# Altium PCB MGMEZZ04TEST.PCBDOC (part 2 of 2)
Units mil, origin at the board's own origin, x right, y up, seen from the top; angles counter-clockwise.
Board outline 4922.86 x 3627.76 mil, 6 copper layers (Top Layer, Internal Plane 1, Mid-Layer 1, Internal Plane 2, Mid-Layer 2, Bottom Layer); 10 components, 606 nets, 200 pads, 150 vias.
Unrouted connection lines stored in the file: 9.
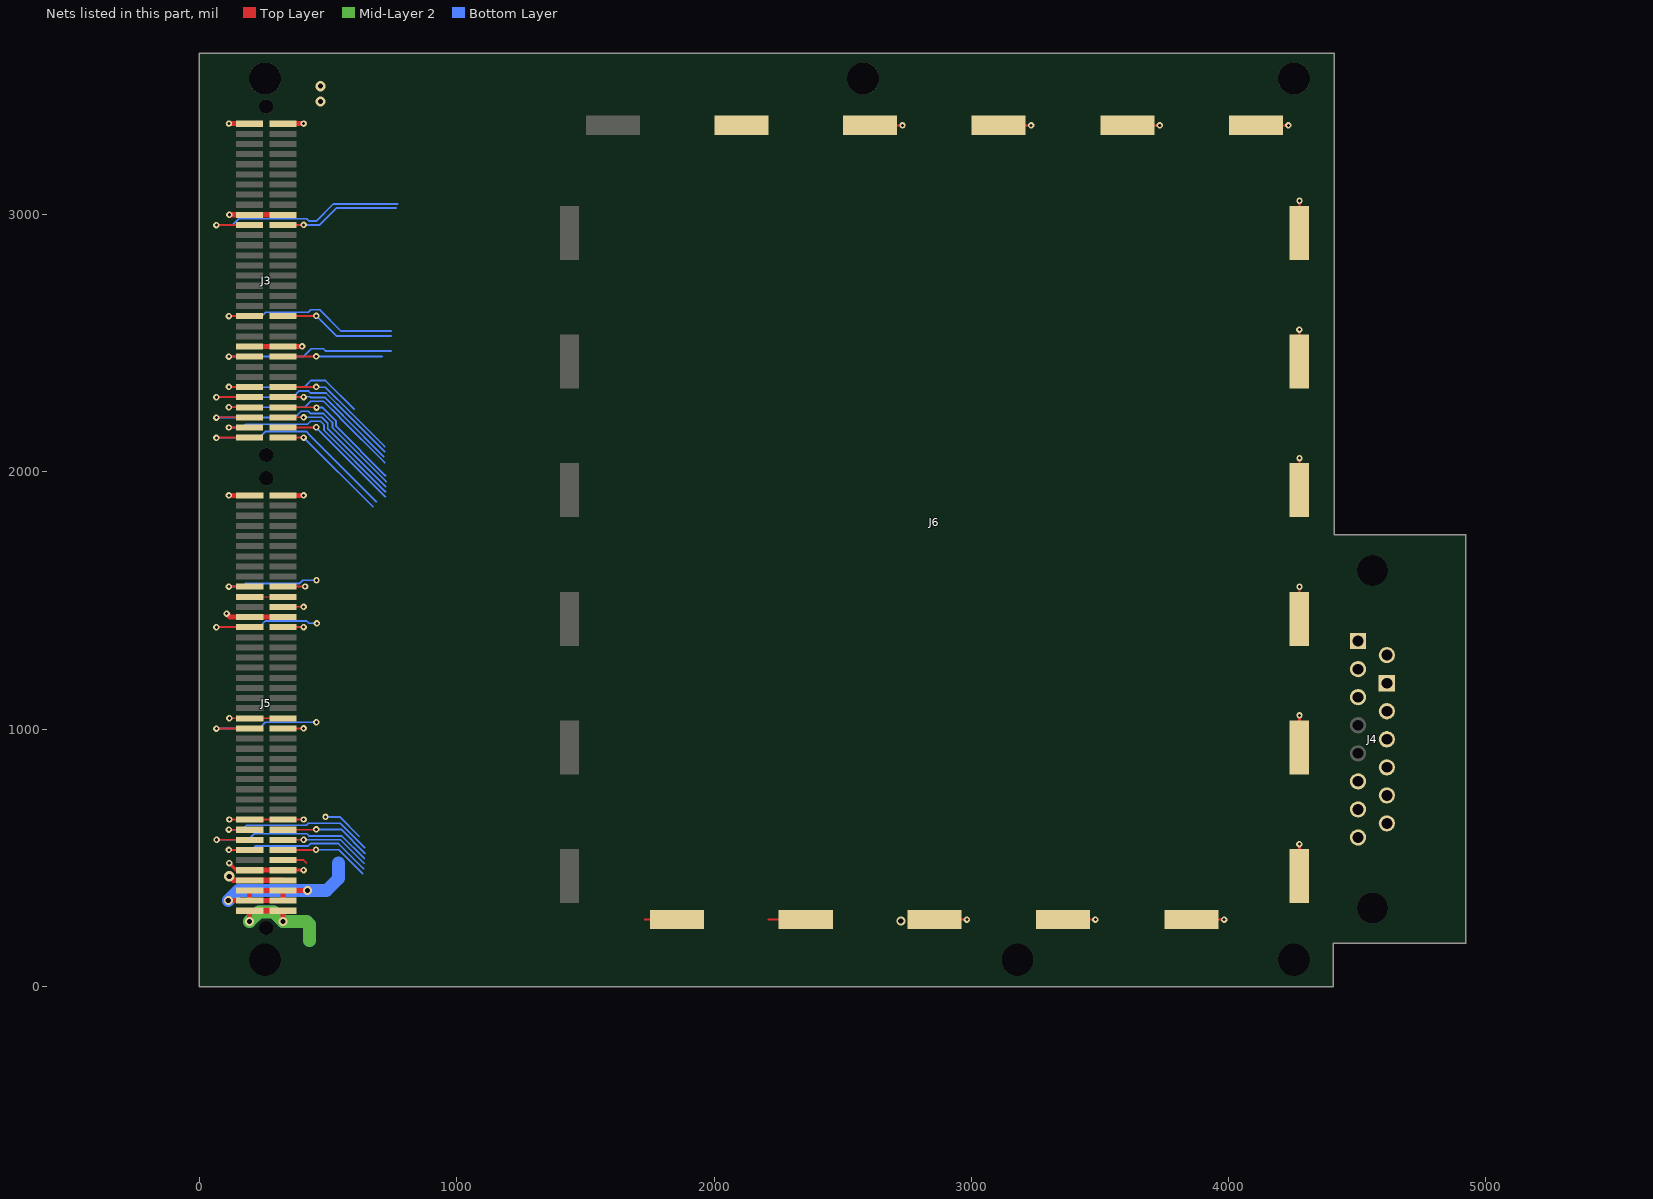
[diagram p6: the nets of this part, all layers, seen from the top]

## Via types
v1: diameter 25, hole 12, Top Layer to Bottom Layer, 142 vias
v2: diameter 35, hole 20, Top Layer to Bottom Layer, 5 vias
v3: diameter 40, hole 20, Top Layer to Bottom Layer, 3 vias

## Nets (pads, with @x,y where several pads share a name; then routed paths per layer and width w, separated by ;. In a path a pad name is that pad's centre, name@x,y a point inside that pad or via, vN(x,y) a via of type N, cw(c..) or ccw(c..) an arc to the next point about the centre after c; other vN are vias at no path point) (continued)
DEMODB_DATA3: 
DEMODB_DATA3: J3.53 | length 624
  Top Layer w7: v1(114.33,2329.9) 194.45,2329.9 J3.53@194.63,2329.9
  Bottom Layer w7: v1(114.33,2329.9) 115.3,2328.93 406.57,2328.93 416.57,2338.93 416.63,2338.93 432.63,2354.93 489.07,2354.93 600.63,2243.37
DEMODB_DATA4: 
DEMODB_DATA4: J3.54 | length 491.2
  Top Layer w7: J3.54@324.55,2329.9 453.17,2329.9 v1(453.63,2330.37)
  Bottom Layer w7: v1(453.63,2330.37) 455.07,2328.93 489.07,2328.93 586.63,2231.37 586.63,2231 719.27,2098.37
DEMODB_DATA5: 
DEMODB_DATA5: J3.55 | length 891.3
  Top Layer w7: v1(65.55,2289.77) 66.32,2290.53 194.45,2290.53 J3.55@194.63,2290.53
  Bottom Layer w7: v1(65.55,2289.77) 363.63,2289.77 388.27,2314.4 422.63,2314.4 430.67,2306.37 491.63,2306.37 572.63,2225.37 572.63,2225 719.27,2078.37
DEMODB_DATA6: 
DEMODB_DATA6: J3.56 | length 489
  Top Layer w7: J3.56@324.55,2290.53 v1(404.85,2290.53)
  Bottom Layer w7: v1(404.85,2290.53) 405.25,2290.93 405.85,2290.93 406.45,2291.93 431.07,2291.93 433.63,2289.37 486.63,2289.37 558.63,2217.37 558.63,2217 716.27,2059.37
DEMODB_DATA7: 
DEMODB_DATA7: J3.57 | length 794
  Top Layer w7: v1(114.33,2251.17) 194.45,2251.17 J3.57@194.63,2251.17
  Bottom Layer w7: v1(114.33,2251.17) 114.57,2250.93 408.57,2250.93 422.57,2264.93 422.8,2264.93 431.8,2274.37 481.63,2274.37 544.63,2211.37 544.63,2211 719.27,2036.37
DEMODB_DATA8: 
DEMODB_DATA8: J3.58 | length 520.8
  Top Layer w7: J3.58@324.55,2251.17 452.87,2251.17 v1@454.63,2249.4
  Bottom Layer w7: v1(454.63,2249.37) 455.2,2250.37 477.63,2250.37 530.63,2197.37 530.63,2177 722.27,1985.37
DEMODB_DATA9: 
DEMODB_DATA9: J3.59 | length 924.5
  Top Layer w7: v1(65.55,2211.03) 66.32,2211.8 194.45,2211.8 J3.59@194.63,2211.8
  Bottom Layer w7: v1(65.55,2211.03) 369.67,2211.03 394.3,2235.67 422.63,2235.67 431.63,2226.37 481.63,2226.37 516.63,2191.37 516.63,2171 725.27,1962.37
DEMODB_DATA10: 
DEMODB_DATA10: J3.60 | length 522.8
  Top Layer w7: J3.60@324.55,2211.8 v1(404.85,2211.8)
  Bottom Layer w7: v1(404.85,2211.8) 475.2,2211.8 498.63,2188.37 498.63,2167 723.27,1942.37
DEMODB_DATA11: 
DEMODB_DATA11: J3.61 | length 824.2
  Top Layer w7: v1(114.33,2172.43) 194.45,2172.43 J3.61@194.63,2172.43
  Bottom Layer w7: v1(114.33,2172.43) 166.13,2172.43 178.63,2184.93 419.63,2184.93 431.63,2196.93 470.07,2196.93 483.63,2183.37 483.63,2162 722.27,1923.37
DEMODB_DATA12: 
DEMODB_DATA12: J3.62 | length 510.6
  Top Layer w7: J3.62@324.55,2172.43 452.87,2172.43 v1(453.63,2173.2)
  Bottom Layer w7: v1(453.63,2173.2) 453.8,2173.2 453.8,2171.83 722.27,1903.37
DEMODB_DATA13: 
DEMODB_DATA13: J3.63 | length 874.9
  Top Layer w7: v1(65.55,2132.3) 66.32,2133.07 194.45,2133.07 J3.63@194.63,2133.07
  Bottom Layer w7: v1(65.55,2132.3) 232,2132.3 256.63,2156.93 414.07,2156.93 428.63,2142.37 428.63,2142 687.27,1883.37
DEMODB_DATA14: 
DEMODB_DATA14: J3.64 | length 461.2
  Top Layer w7: J3.64@324.55,2133.07 v1(404.85,2133.07)
  Bottom Layer w7: v1(404.85,2133.07) 405.93,2133.07 407.63,2131.37 407.63,2131 674.27,1864.37
GND_DIG: 
GND_EARTH: J3.19 J3.20 J3.45 J3.46 J5.25 J5.26 J5.45 J5.46 J5.65 J5.66 J5.75 J5.76 | length 1436.8
  Top Layer w7: v1(115.87,648.63) 194.52,648.63 194.63,648.63 324.43,648.63 v1(404.35,648.63) v1@403.55,649.43 ; v1(115.87,1042.3) 194.52,1042.3 324.43,1042.3 J5.46@324.55,1042.3 ; v1@403.55,452.6 v1(404.35,451.8)
  Top Layer w12: v1(115.6,479) 142.8,451.8 194.52,451.8 J5.75@194.63,451.8 ; J5.76@324.55,451.8 v1(404.35,451.8)
  Top Layer w20: v1(105,1449) 118.03,1435.97 194.52,1435.97 324.43,1435.97 J5.26@324.55,1435.97 ; v1(115.87,2999.13) 194.45,2999.13 324.37,2999.13 J3.20@324.55,2999.13 ; J5.75@194.63,451.8 324.43,451.8 J5.76@324.55,451.8 ; J3.45@194.63,2487.37 324.37,2487.37 v1(398.37,2487.37)
GND_SIGNAL: J6.1 J6.2 J6.3 J6.4 J6.5 J6.6 J6.7 J6.8 J6.9 J6.10 J6.11 J6.19 J6.20 J6.21 J6.22 J6.23 | length 1936.6
  Top Layer w7: 1731.63,259 1731.13,259.5 1856.13,259.5 J6.11@1856.63,259.5 ; 2210.13,259.5 2356.13,259.5 J6.10@2356.63,259.5 ; J6.20@2606.63,3346.5 v1(2732.13,3346.5) v1@2731.63,3347 ; J6.9@2856.63,259.5 v1(2982.13,259.5) v1@2981.63,260 ; J6.21@3106.63,3346.5 v1(3232.13,3346.5) v1@3231.63,3347 ; J6.8@3356.63,259.5 v1(3482.13,259.5) v1@3481.63,260 ; J6.22@3606.63,3346.5 v1(3732.13,3346.5) v1@3731.63,3347 ; J6.7@3856.63,259.5 v1(3982.13,259.5) v1@3981.63,260 ; J6.23@4106.63,3346.5 v1(4232.13,3346.5) v1@4231.63,3347 ; v1(4274.63,553) v1@4275.13,553.5 ; v1@4274.63,1053 v1(4275.13,1053.5) ; v1@4274.63,1553 v1(4275.13,1553.5) 4275.13,1428.8 J6.4@4275.13,1428 ; v1@4274.63,2053 v1(4275.13,2053.5) 4275.13,1928.8 J6.3@4275.13,1928 ; v1(4274.63,2553) 4275.13,2553.5 4275.13,2553 4275.13,2428.8 J6.2@4275.13,2428 ; v1@4274.63,3053 v1(4275.13,3053.5) 4275.13,2928.8 J6.1@4275.13,2928
  Top Layer w10: J6.6@4275.13,428 4275.13,428.8 4275.13,553 v1@4275.13,553.5 ; J6.5@4275.13,928 4275.13,928.8 v1(4275.13,1053.5)
  Bottom Layer w7: v1(4274.63,553) v1@4278,556.37 ; v1@4274.63,1053 4271,1053 4272.82,1051.18 v1@4278,1046 ; v1@4275.32,1053.68 v1@4278,1051
  Bottom Layer w10: v1@4274.63,1053 4274.63,1053.5 4274.63,1053.63 4274.82,1053.82 v1@4275,1054
  other v2: 2725.63,254
NetCA1_1: 
NetCA2_1: 
NetCA8_1: 
NetCA8_2: 
NetCA9_1: 
NetCA9_2: 
NetCA10_1: 
NetCA10_2: 
NetCA11_2: 
NetCA12_1: 
NetCA19_2: 
NetCA20_1: 
NetCA28_1: 
NetCA28_2: 
NetCA29_1: 
NetCA29_2: 
NetCA30_1: 
NetCA30_2: 
NetCA31_1: 
NetCA33_2: 
NetCA35_2: 
NetCA46_1: J4.11
NetCA46_2: 
NetCA47_1: 
NetCA47_2: J4.3
NetCA48_1: J4.13
NetCA48_2: 
NetCA49_1: 
NetCA49_2: J4.6
NetCD5_1: 
NetCD5_2: 
NetCD8_2: 
NetCD9_2: 
NetCD10_1: 
NetCD10_2: 
NetCD11_1: 
NetCD11_2: 
NetCD13_1: 
NetCD13_2: 
NetCD17_1: 
NetCD18_1: 
NetCD18_2: 
NetCD25_1: 
NetCD25_2: 
NetCD28_2: 
NetCD29_2: 
NetCD30_1: 
NetCD30_2: 
NetCD31_1: 
NetCD31_2: 
NetCD33_1: 
NetCD33_2: 
NetCD37_1: 
NetCD38_1: 
NetCD38_2: 
NetCD45_1: 
NetCD45_2: 
NetCD48_2: 
NetCD49_2: 
NetCD50_1: 
NetCD50_2: 
NetCD51_1: 
NetCD51_2: 
NetCD53_1: 
NetCD53_2: 
NetCD57_1: 
NetCD58_1: 
NetCD58_2: 
NetCD65_1: 
NetCD65_2: 
NetCD68_2: 
NetCD69_2: 
NetCD70_1: 
NetCD70_2: 
NetCD71_1: 
NetCD71_2: 
NetCD73_1: 
NetCD73_2: 
NetCD77_1: 
NetCD78_1: 
NetCD78_2: 
NetCP1_2: 
NetCP2_2: 
NetCP3_2: 
NetCP4_1: 
NetCP5_1: J5.79 J5.80 J5.81 J5.82 | length 1132.3
  Top Layer w7: J5.80@324.55,373.07 324.62,373 v2@416.63,373 ; v2@416.7,373.07 v2@416.63,373 ; v2(419.63,373) v2@416.63,373
  Top Layer w20: v2(111.63,334) 194.33,334 J5.81@194.63,333.7 ; v2@416.7,373.07 J5.80@324.55,373.07 ; J5.81@194.63,333.7 324.43,333.7 324.55,333.7 324.55,372.67 J5.80@324.55,373.07 ; J5.81@194.63,333.7 194.63,372.67 194.63,373.07 324.43,373.07 J5.80@324.55,373.07
  Bottom Layer w50: v2(111.63,334) 150.63,373 v2(419.63,373) 493.63,373 539.63,419 539.63,479
NetCP6_1: 
NetCP8_1: 
NetCP9_1: 
NetCP11_2: 
NetCP12_1: J5.77 J5.78 | length 215.2
  Top Layer w20: v3(115.7,427.82) 131.08,412.43 194.52,412.43 324.43,412.43 J5.78@324.55,412.43
  other v3: 470,3439 470,3499
NetCP13_1: 
NetCP15_2: 
NetCP17_2: J5.83 J5.84 | length 873.2
  Top Layer w20: v2(194.63,252.92) 194.63,293.93 194.63,294.33 324.43,294.33 324.55,294.33 324.55,293.93 v2(324.55,252.92)
  Mid-Layer 2 w50: v2(194.63,252.92) 230.72,289 288.47,289 v2(324.55,252.92) 415.72,252.92 427.63,241 427.63,179
  Bottom Layer w50: v2(194.63,252.92) 231.72,290 287.47,290 v2(324.55,252.92) 415.72,252.92 427.63,241 427.63,179
NetCP18_1: 
NetCP20_1: 
NetCP45_1: 
NetCP46_1: 
NetDP1_2: 
NetDP2_2: 
NetDP3_2: 
NetDP4_1: 
NetDP5_2: 
NetJ3_21: J3.21 | length 877.9
  Top Layer w7: v1@64.23,2959.77 65.55,2959.77 v1@66.32,2959.77 ; v1(65.55,2959) v1@66.32,2959.77 ; J3.21@194.63,2959.77 194.45,2959.77 v1@66.32,2959.77
  Bottom Layer w7: v1(65.55,2959) 127.27,2959 151.7,2983.43 416.63,2983.43 425.63,2974.43 453.07,2974.43 520,3041 770.63,3041
NetJ3_22: J3.22 | length 466.4
  Top Layer w7: J3.22@324.55,2959.77 v1(404.85,2959.77)
  Bottom Layer w7: v1(404.85,2959.77) 467.4,2959.77 534,3026 763.63,3026
NetJ3_39: J3.39 | length 754.5
  Top Layer w7: v1(114.33,2605.47) 194.45,2605.47 J3.39@194.63,2605.47
  Bottom Layer w7: v1(114.33,2605.47) 241.73,2605.47 256.63,2620.37 422.03,2620.37 431.63,2629.97 467.03,2629.97 549.63,2547.37 744.13,2547.37
NetJ3_40: J3.40 | length 452.2
  Top Layer w7: J3.40@324.55,2605.47 452.87,2605.47 v1(453.63,2606.23)
  Bottom Layer w7: v1(453.63,2606.23) 453.77,2606.23 531.63,2528.37 744.13,2528.37
NetJ3_47: J3.47 | length 728.1
  Top Layer w7: v1@113.63,2447 114.57,2447.68 v1@115,2448 ; v1(114.33,2448) v1@115,2448 ; J3.47@194.63,2448 194.45,2448 v1@115,2448
  Bottom Layer w7: v1(114.33,2448) 403.55,2448 422.05,2466.37 ; 422.07,2466.37 433.93,2478.37 481.63,2478.37 490.63,2469.37 744.13,2469.37
NetJ3_48: J3.48 | length 385.4
  Top Layer w7: J3.48@324.55,2448 452.87,2448 v1(453.63,2448.77)
  Bottom Layer w7: v1(453.63,2448.77) 709.63,2448.77
NetJ4_1: J4.1
NetJ4_2: J4.2
NetJ4_7: J4.7
NetJ4_8: J4.8
NetJ4_9: J4.9
NetJ4_10: J4.10
NetJ4_12: J4.12
NetJ4_14: J4.14
NetJ4_15: J4.15
NetJ5_19: J5.19 | length 430.7
  Top Layer w7: v1(114.33,1554.07) 194.52,1554.07 J5.19@194.63,1554.07
  Bottom Layer w7: v1(114.33,1554.07) 166.13,1554.07 178.63,1566.57 389.63,1566.57 401.63,1578.57 v1(454.63,1578.57)
NetJ5_20: J5.20 | length 86.8
  Top Layer w7: J5.20@324.55,1554.07 410.63,1554.07 410.93,1554.07 v1(410.63,1554.37)
NetJ5_21: J5.21 J5.22 | length 129.9
  Top Layer w4: J5.21@194.63,1514.7 324.43,1514.7 J5.22@324.55,1514.7
NetJ5_24: J5.24 | length 80.3
  Top Layer w7: J5.24@324.55,1475.33 v1(404.85,1475.33)
NetJ5_27: J5.27 | length 533.4
  Top Layer w7: v1(65.55,1395.83) 66.32,1396.6 194.52,1396.6 J5.27@194.63,1396.6
  Bottom Layer w7: v1(65.55,1395.83) 231.2,1395.83 255.63,1420.27 416.63,1420.27 425.63,1411.27 v1(455.73,1411.27)
NetJ5_28: J5.28 | length 80.3
  Top Layer w7: J5.28@324.55,1396.6 v1(404.85,1396.6)
NetJ5_47: J5.47 | length 527.8
  Top Layer w7: v1(65.55,1002.17) 66.32,1002.93 194.52,1002.93 J5.47@194.63,1002.93
  Bottom Layer w7: v1(65.55,1002.17) 231.2,1002.17 255.63,1026.6 v1(453.87,1026.6)
NetJ5_48: J5.48 | length 80.3
  Top Layer w7: J5.48@324.55,1002.93 v1(404.85,1002.93)
NetJ5_67: J5.67 | length 655.6
  Top Layer w7: v1(114.33,609.27) 194.52,609.27 J5.67@194.63,609.27
  Bottom Layer w7: v1(114.33,609.27) 166.13,609.27 182.63,626 414.58,626 422.53,633.77 547.37,633.77 640.77,540.37
NetJ5_68: J5.68 | length 360.9
  Top Layer w7: J5.68@324.55,609.27 452.87,609.27 v1(453.63,610.03)
  Bottom Layer w7: v1@449.63,610.03 v1(453.63,610.03) 550.1,610.03 642.77,517.37
NetJ5_69: J5.69 | length 751
  Top Layer w7: v1(66.55,569.9) 194.52,569.9 J5.69@194.63,569.9
  Bottom Layer w7: v1(66.55,569.9) 188.77,569.9 212.2,593 417.63,593 425.63,584.57 553.07,584.57 640.27,497.37
NetJ5_70: J5.70 | length 355.4
  Top Layer w7: J5.70@324.55,569.9 v1(404.85,569.9) v1@406.17,569.9
  Bottom Layer w7: v1@403.85,568.9 v1(404.85,569.9) 547.73,569.9 639.27,478.37
NetJ5_71: J5.71 | length 652.9
  Top Layer w7: v1(114.33,530.53) 194.52,530.53 J5.71@194.63,530.53
  Bottom Layer w7: v1(114.33,530.53) 203.63,530.53 219.13,546 422.67,546 431.63,555.03 540.1,555.03 636.77,458.37
NetJ5_72: J5.72 | length 349.1
  Top Layer w7: J5.72@324.55,530.53 452.63,530.53 452.87,530.53 452.87,530.77 v1(452.63,531)
  Bottom Layer w7: v1(452.63,531) 452.93,531.3 541.33,531.3 634.27,438.37
NetJ5_74: J5.74 | length 255.8
  Top Layer w7: J5.74@324.55,491.17 403.47,491.17 414.63,480
  Bottom Layer w7: v1(489.63,659) 544.63,659 619.63,584
NetRA1_2: 
NetRA3_2: 
NetRA5_2: 
NetRA7_1: 
NetRA10_2: 
NetRA11_1: 
NetRA11_2: 
NetRA12_2: 
NetRA13_1: 
NetRA14_1: 
NetRA15_1: 
NetRA16_1: 
NetRA17_1: 
NetRA17_2: 
NetRA21_2: 
NetRA22_2: 
NetRA23_2: 
NetRA24_2: 
NetRA25_2: 
NetRA26_2: 
NetRA27_1: 
NetRA27_2: 
NetRA28_2: 
NetRA30_2: 
NetRA31_2: 
NetRA32_1: 
NetRA32_2: 
NetRA33_2: 
NetRA34_1: 
NetRA34_2: 
NetRA35_2: 
NetRA37_1: 
NetRA38_1: 
NetRA39_1: 
NetRA42_2: 
NetRA45_1: 
NetRA45_2: 
NetRA46_2: 
NetRA48_2: 
NetRA49_1: 
NetRA50_2: 
NetRA51_1: 
NetRA51_2: 
NetRA52_2: 
NetRA55_2: 
NetRD1_2: 
NetRD2_1: 
NetRD2_2: 
NetRD2SET1_1: 
NetRD2SET1_2: 
NetRD2SET2_1: 
NetRD2SET2_2: 
NetRD2SET3_1: 
NetRD2SET3_2: 
NetRD2SET4_1: 
NetRD2SET4_2: 
NetRD3_1: 
NetRD4_1: 
NetRD5_1: 
NetRD6_1: 
NetRD7_1: 
NetRD9_2: 
NetRD10_2: 
NetRD12_2: 
NetRD17_2: 
NetRD19_2: 
NetRD21_1: 
NetRD21_2: 
NetRD22_1: 
NetRD23_2: 
NetRD24_2: 
NetRD27_1: 
NetRD29_2: 
NetRD31_2: 
NetRD32_1: 
NetRD32_2: 
NetRD33_1: 
NetRD34_1: 
NetRD35_1: 
NetRD36_1: 
NetRD37_1: 
NetRD39_2: 
NetRD40_2: 
NetRD42_2: 
NetRD47_2: 
NetRD49_2: 
NetRD51_1: 
NetRD51_2: 
NetRD52_1: 
NetRD53_2: 
NetRD54_2: 
NetRD57_1: 
NetRD59_2: 
NetRD61_2: 
NetRD62_1: 
NetRD62_2: 
NetRD63_1: 
NetRD64_1: 
NetRD65_1: 
NetRD66_1: 
NetRD67_1: 
NetRD69_2: 
NetRD70_2: 
NetRD72_2: 
NetRD77_2: 
NetRD79_2: 
NetRD81_1: 
NetRD81_2: 
NetRD82_1: 
NetRD83_2: 
NetRD84_2: 
NetRD87_1: 
NetRD89_2: 
NetRD91_2: 
NetRD92_1: 
NetRD92_2: 
NetRD93_1: 
NetRD94_1: 
NetRD95_1: 
NetRD96_1: 
NetRD97_1: 
NetRD99_2: 
NetRD100_2: 
NetRD102_2: 
NetRD107_2: 
NetRD109_2: 
NetRD111_1: 
NetRD111_2: 
NetRD112_1: 
NetRD113_2: 
NetRD114_2: 
NetRD117_1: 
NetRD119_2: 
NetRP5_2: 
NetRP9_2: 
NetRP14_2: 
NetRP20_1: 
NetRP21_2: 
NetRP26_2: 
NetRP28_2: 
NetUD1_26: 
NetUD9_26: 
NetUP5_15: 
NetUT31_26: 
NetUT31_27: 
NetUT31_29: 
NetUT31_30: 
NetUT31_32: 
NetUT31_33: 
NetUT31_35: 
NetUT31_36: 
NetUT31_37: 
NetUT31_38: 
NetUT31_40: 
NetUT31_41: 
NetUT31_43: 
NetUT31_44: 
NetUT31_46: 
NetUT31_47: 
NetUT32_36: 
NetUT32_41: 
NetUT32_43: 
NetUT32_44: 
NetUT32_46: 
NetUT32_47: 
NetUT35_26: 
NetUT35_27: 
NetUT35_29: 
NetUT35_30: 
NetUT35_32: 
NetUT35_33: 
NetUT35_35: 
NetUT35_36: 
NetUT35_37: 
NetUT35_38: 
NetUT35_40: 
NetUT35_41: 
NetUT35_43: 
NetUT35_44: 
NetUT35_46: 
NetUT35_47: 
NetUT40_26: 
NetUT40_27: 
NetUT40_29: 
NetUT40_30: 
NetUT40_32: 
NetUT40_33: 
NetUT40_35: 
NetUT40_36: 
NetUT40_37: 
NetUT40_38: 
NetUT40_40: 
NetUT40_41: 
NetUT40_43: 
NetUT40_44: 
NetUT40_46: 
NetUT40_47: 
NetUT45_26: 
NetUT45_27: 
NetUT45_29: 
NetUT45_30: 
NetUT45_32: 
NetUT45_33: 
NetUT45_35: 
NetUT45_36: 
NetUT45_37: 
NetUT45_38: 
NetUT45_40: 
NetUT45_41: 
NetUT45_43: 
NetUT45_44: 
NetUT45_46: 
NetUT45_47: 
NetUT50_26: 
NetUT50_27: 
NetUT50_29: 
NetUT50_30: 
NetUT50_32: 
NetUT50_33: 
NetUT50_35: 
NetUT50_36: 
NetUT50_37: 
NetUT50_38: 
NetUT50_40: 
NetUT50_41: 
NetUT50_43: 
NetUT50_44: 
NetUT50_46: 
NetUT50_47: 
NetUT55_26: 
NetUT55_27: 
NetUT55_29: 
NetUT55_30: 
NetUT55_32: 
NetUT55_33: 
NetUT55_35: 
NetUT55_36: 
NetUT55_37: 
NetUT55_38: 
NetUT55_40: 
NetUT55_41: 
NetUT55_43: 
NetUT55_44: 
NetUT55_46: 
NetUT55_47: 
NetUT60_26: 
NetUT60_27: 
NetUT60_29: 
NetUT60_30: 
NetUT60_32: 
NetUT60_33: 
NetUT60_35: 
NetUT60_36: 
NetUT60_37: 
NetUT60_38: 
NetUT60_40: 
NetUT60_41: 
NetUT60_43: 
NetUT60_44: 
NetUT60_46: 
NetUT60_47: 
POWER_DATA0: 
POWER_DATA1: 
POWER_DATA2: 
POWER_DATA3: 
POWER_DATA4: 
TRAN1_DATA0: 
TRAN1_DATA1: 
TRAN1_DATA2: 
TRAN1_DATA3: 
TRAN1_DATA4: 
TRAN1_DATA5: 
TRAN1_DATA6: 
TRAN1_DATA7: 
TRAN1_DATA8: 
TRAN1_DATA9: 
TRAN1_DATA10: 
TRAN1_DATA11: 
TRAN1_DATA12: 
TRAN1_DATA13: 
TRAN1_DATA14: 
TRAN1_DATA15: 
TRAN2_DATA0: 
TRAN2_DATA1: 
TRAN2_DATA2: 
TRAN2_DATA3: 
TRAN2_DATA4: 
TRAN2_DATA5: 
TRAN2_DATA6: 
TRAN2_DATA7: 
TRAN2_DATA8: 
TRAN2_DATA9: 
TRAN2_DATA10: 
TRAN2_DATA11: 
TRAN2_DATA12: 
TRAN2_DATA13: 
TRAN2_DATA14: 
TRAN2_DATA15: 
TRAN3_DATA0: 
TRAN3_DATA1: 
TRAN3_DATA2: 
TRAN3_DATA3: 
TRAN3_DATA4: 
TRAN3_DATA5: 
TRAN3_DATA6: 
TRAN3_DATA7: 
TRAN3_DATA8: 
TRAN3_DATA9: 
TRAN3_DATA10: 
TRAN3_DATA11: 
TRAN3_DATA12: 
TRAN3_DATA13: 
TRAN3_DATA14: 
TRAN3_DATA15: 
TRAN4_DATA0: 
TRAN4_DATA1: 
TRAN4_DATA2: 
TRAN4_DATA3: 
TRAN4_DATA4: 
TRAN4_DATA5: 
TRAN4_DATA6: 
TRAN4_DATA7: 
TRAN4_DATA8: 
TRAN4_DATA9: 
TRAN4_DATA10: 
TRAN4_DATA11: 
TRAN4_DATA12: 
TRAN4_DATA13: 
TRAN4_DATA14: 
TRAN4_DATA15: 
VCC3VP: 
VCC5VN: 
VCC5VP: 
VDD3V: 
VDD_EXT: J3.1 J3.2 J5.1 J5.2 pad.1 | length 321.2
  Top Layer w20: v1(114.33,1908.37) 194.52,1908.37 J5.1@194.63,1908.37 ; pad.1@114.33,3353.43 194.45,3353.43 J3.1@194.63,3353.43 ; J5.2@324.55,1908.37 v1(404.85,1908.37) ; J3.2@324.55,3353.43 pad.1@404.85,3353.43
pads on no net: J3.41 J3.42 J3.49 J3.HOLE1 J3.HOLE2 J4.4 J4.5 J4.Hole29 J4.Hole30 J5.18 J5.23 J5.73 J5.HOLE1 J5.HOLE2 J6.12 J6.13 J6.14 J6.15 J6.16 J6.17 J6.18 MH1.1 MH2.1 MH3.1 MH4.1 MH5.1 MH6.1

## Polygon pours and split planes (outlines as drawn)
NetCP12_1 on Mid-Layer 2 "Mid-Layer 2-N1002964" (hatched Horizontal grid 7.5 track 8, remove dead copper, pour order 1005): 54.63,499 169.63,499 169.63,3314 344.63,3489 419.63,3489 419.63,3544 524.63,3544 524.63,3389 389.63,3389 339.63,3339 339.63,384 54.63,384
no net on Top Overlay (hatched 90Degree grid 7.5 track 8, remove dead copper): 4345,1335 4345,1350 4377.5,1350 4377.5,1370 4417.5,1342.5 4377.5,1315 4377.5,1335
no net on Top Overlay (hatched 90Degree grid 7.5 track 8, remove dead copper): 15,1900 15,1915 47.5,1915 47.5,1935 87.5,1907.5 47.5,1880 47.5,1900
no net on Top Overlay (hatched 90Degree grid 7.5 track 8, remove dead copper): 12.5,3345 12.5,3360 45,3360 45,3380 85,3352.5 45,3325 45,3345
GND_SIGNAL on Internal Plane 1 (split plane): 4389.98,1755.02 4390.37,1751.09 4391.51,1747.32 4393.37,1743.85 4395.87,1740.8 4398.92,1738.31 4402.39,1736.45 4406.16,1735.3 4410.08,1734.92 4901.75,1734.92 4901.75,188.08 4406.02,188.08 4402.09,187.7 4398.32,186.55 4394.85,184.69 4391.8,182.2 4389.31,179.15 4387.45,175.68 4386.3,171.91 4385.92,167.98 4385.92,19.08 19.08,19.08 19.08,3606.65 4389.98,3606.65
VDD_EXT on Internal Plane 2 (split plane): 4389.98,1755.02 4390.37,1751.09 4391.51,1747.32 4393.37,1743.85 4395.87,1740.8 4398.92,1738.31 4402.39,1736.45 4406.16,1735.3 4410.08,1734.92 4901.75,1734.92 4901.75,188.08 4406.02,188.08 4402.09,187.7 4398.32,186.55 4394.85,184.69 4391.8,182.2 4389.31,179.15 4387.45,175.68 4386.3,171.91 4385.92,167.98 4385.92,19.08 19.08,19.08 19.08,3606.65 4389.98,3606.65

## Keep-outs
Keep-Out Layer:
  lines w50: 0,0 4405,-1 4405,169 4920.83,169 4920.83,1754 4410,1754 4409.07,1814.87 4409.07,3625.73 0,3625.73 0,0
  text "KEEPOUT" at 2010,-1917.5 h100

## Other copper
Top Layer:
  text "Board Dim: 92mm x 125mm" at 4861.62,436.7 h30 r90
  text "L1 (TOP) .GTL" at 434.63,-686.63 h100
Mid-Layer 1:
  text "L3 (ML1) .G1" at 434.63,-1086.63 h100
Mid-Layer 2:
  text "L5 (ML2) .G2" at 409.63,-1286.63 h100
Bottom Layer:
  text "L6 (BOT) .GBL" at 1319.63,-1714.13 h100
Internal Plane 1 (plane layer: these items are gaps in the copper):
  lines w0.03: 989.63,3629 1737.03,3629
  lines w10: -486.8,4.07 -261.8,4.07 ; -486.8,3625.73 -261.8,3625.73 ; -393.05,60.32 -374.3,4.07 ; -393.05,3569.48 -374.3,3625.73 ; -374.3,1626.98 -374.3,4.07 ; -374.3,2002.82 -374.3,3625.73 ; -355.55,60.32 -374.3,4.07 ; -355.55,3569.48 -374.3,3625.73 ; 0,-629.63 0,-404.63 ; 0,-348.47 0,-123.47 ; 56.25,-535.88 0,-517.13 ; 56.25,-498.38 0,-517.13 ; 56.25,-254.72 0,-235.97 ; 56.25,-217.22 0,-235.97 ; 993.63,3629 0,3629 0,-1 1029.63,-1 1679.63,-1 ; 2014.58,-235.97 0,-235.97 ; 2276.67,-517.13 0,-517.13 ; 2390.42,-235.97 4405,-235.97 ; 2644.17,-517.13 4920.83,-517.13 ; 4348.75,-254.72 4405,-235.97 ; 4348.75,-217.22 4405,-235.97 ; 4405,-348.47 4405,-123.47 ; 4864.58,-535.88 4920.83,-517.13 ; 4864.58,-498.38 4920.83,-517.13 ; 4920.83,-629.63 4920.83,-404.63 ; 5191.37,-1 5416.37,-1 ; 5191.37,1754 5416.37,1754 ; 5285.12,55.25 5303.87,-1 ; 5285.12,1697.75 5303.87,1754 ; 5287,169 5512,169 ; 5287,1754 5512,1754 ; 5303.87,696.92 5303.87,-1 ; 5303.87,1056.08 5303.87,1754 ; 5322.62,55.25 5303.87,-1 ; 5322.62,1697.75 5303.87,1754 ; 5380.75,225.25 5399.5,169 ; 5380.75,1697.75 5399.5,1754 ; 5399.5,781.92 5399.5,169 ; 5399.5,1141.08 5399.5,1754 ; 5418.25,225.25 5399.5,169 ; 5418.25,1697.75 5399.5,1754
  text "3622m" at -324.3,1683.23 h56.25 r90
  text "1585m" at 5349.5,1084.83 h56.25 r270
  text "1755m" at 5253.87,999.83 h56.25 r270
  text "4405m" at 2070.83,-285.97 h56.25
  text "4921m" at 2332.92,-567.13 h56.25
  text "L2 (GND) .GP1" at 402.13,-876.63 h100
Internal Plane 2 (plane layer: these items are gaps in the copper):
  lines w8: -4.9,0 -4.9,3625.73 ; 0,-4.9 751.73,-5.07 ; 0,3630.64 1065.86,3630.64 ; 1075.73,3623.9 1730.54,3623.9
  lines w10: 1070.63,3629 1735.63,3629 ; 1736.63,3629 4407.5,3629 4407.5,1755 4922.63,1755 4922.63,170 4402.5,170 4402.5,-1 2654.63,-1
  text "VCC5p Analog" at 2780,3552.5 h37.5
  text "L4 (PWR) .GP2" at 402.13,-1496.63 h100

## Silkscreen, mask and mechanical layers (free items; w line width, h text height)
Top Overlay:
  lines w5: 1479.63,991.37 1479.63,1583.37 ; 1397.63,219 1397.63,3394 4317.63,3394 4317.63,219 1397.63,219 ; 1482.63,304 1482.63,3304 4232.63,3304 4232.63,304 1482.63,304
  text "+6V" at 424.62,3548.98 h40
  text "McGill Digital fMUX DAN Test Mezzanine" at 2684.63,3530.87 h45
  text "Rev 0 - Made in CANADA - July  2012" at 2681.05,3456.23 h33.75
  text "Matt Dobbs <Matt.Dobbs@McGill.ca>, adamjohngilbert@gmail.com" at 2685.05,3400.73 h30
  text "+4V" at 509.62,1938.98 h30
  text "Mount DB15f this side" at 4779.65,585.67 h30 r90
  text "____" at 16.28,246.22 h30 r90
  text "____" at 16.28,246.22 h30 r90
  text "GND" at 84.63,243.37 h40 r90
  text "-6V" at 332.13,58.37 h40
  text "EXT_GND" at 775,15 h35
  text "DIG_GND" at 1070,15 h35
  text "TOP IDENT (.GTO)" at 2394.63,-714.13 h100
Bottom Overlay:
  text "1" at 4472.97,1423.43 h30 r270
  text "____" at 16.28,451.22 h30 r90
  text "____" at 16.28,451.22 h30 r90
  text "____" at 16.28,246.22 h30 r90
  text "BOTTOM IDENT (.GBO)" at 3902.13,-896.63 h100
Top Paste:
  text "TOP SOLDER PASTE (.GTP)" at 2402.13,-1316.63 h100
Bottom Paste:
  text "BOTTOM SOLDER PASTE (.GBP)" at 4542.13,-1716.63 h100
Top Solder:
  text "TOP SOLDER MASK (.GTS)" at 2382.13,-1096.63 h100
Bottom Solder:
  text "BOTTOM SOLDER MASK (.GBS)" at 4522.13,-1516.63 h100
Mechanical 1:
  lines w2: 4869.63,0 4920.83,0 4920.83,56.5 ; 4869.63,3625.73 4920.83,3625.73 4920.83,3579 ; 0,0 0,3625.73 4409.07,3625.73 4409.07,1754 4920.83,1754 4920.83,169 4405,169 4405,0 0,0
  text "McGill: DfMux DAN Mezz Test Board  Rev0" at 467.5,4722.5 h100
  text "Nominal Size: 4.920 x 3.625 inches" at 543,4454 h100
  text "FINISHED BOARD: 0.062\" (Nom)  370HR" at 488,4196.5 h100
  text "ARRANGE LAYERS SEQUENTIALLY: L1-L6" at 528,3986.5 h100
  text "Thieving Copper Dots CAN be added to INNER layers if needed" at 8,3806.5 h80
  text "BOARD OUTLINE" at 412.5,-1912.5 h100
Drill Drawing:
  lines w5: 5620.93,3481.35 7471.32,3481.35
  lines w20: 5274.67,3139.5 5786.48,3139.5 ; 5287.17,3377 5798.98,3377 ; 5294.67,2852.5 5806.48,2852.5 ; 5297.17,2519.5 5808.98,2519.5 ; 5304.67,2064.5 5816.48,2064.5 ; 5305.57,2284.71 5817.38,2284.71
  text "370HR : 6 Layer PCB, Approximate Build:" at 4705,3562.5 h80
  text "TopLayer :0.5oz Plus Plating" at 5865.22,3363.24 h60
  text "L1" at 5105,3340 h80
  text "4.0 mils spacing" at 5708.11,3236.66 h60
  text "Plane 1: 1oz" at 5853.05,3114.2 h60
  text "L2" at 5107.5,3105 h80
  text "5.0 mils spacing" at 5708.11,2986.66 h60
  text "MidLayer1: 1/2oz" at 5844.76,2820.03 h60
  text "L3" at 5090,2817.5 h80
  text "Excess Material" at 5392.5,2635 h60
  text "MidLayer4: 1/2oz" at 5847.26,2487.03 h60
  text "L4" at 5102.5,2482.5 h80
  text "5.0 mils spacing" at 5730,2372.5 h60
  text "L5" at 5122.5,2252.5 h80
  text "Plane 2 : 1oz" at 5896.12,2245.34 h60
  text "4.0 mils spacing" at 5705,2152.5 h60
  text "Bottom Layer :0.5oz Plus Plating" at 5889.49,2045.38 h60
  text "L6" at 5122.5,2030 h80
  text "Total thickness = .093" at 5365.22,1905.57 h60
  text "ALL ROUTED LAYERS:" at 5515,1732.5 h60
  text "7 mils = 50 OHMS" at 5587.5,1612.5 h60
  text "FINISHED HOLE SIZES" at 5385,1382.5 h100
  text ".Legend" at 5172.13,-121.63 h100 r90
  text "DRILL DRAWING (.GD1)" at 2880,-1922.5 h100

## Text inside footprints (layer, text, board x,y; h text height)
J4: Top Overlay "1" at 4482.75,1419.53 h37.5 r270; Top Overlay "SKT" at 4677.63,1702.7 h37.5 r270; Bottom Overlay "15" at 4654.13,598.32 h37.5 r270; Bottom Overlay "8" at 4469.12,504.42 h37.5 r270; Bottom Overlay "9" at 4714.13,1299.42 h37.5 r90